# Altium PCB PCB.PcbDoc (part 1 of 2)
Units mm, origin at the board's own origin, x right, y up, seen from the top; angles counter-clockwise.
Board outline 144.27 x 96.27 mm, 4 copper layers (Top Layer, Layer 1, Layer 2, Bottom Layer), stack 0.603 mm thick; 103 components, 109 nets, 723 pads, 259 vias.
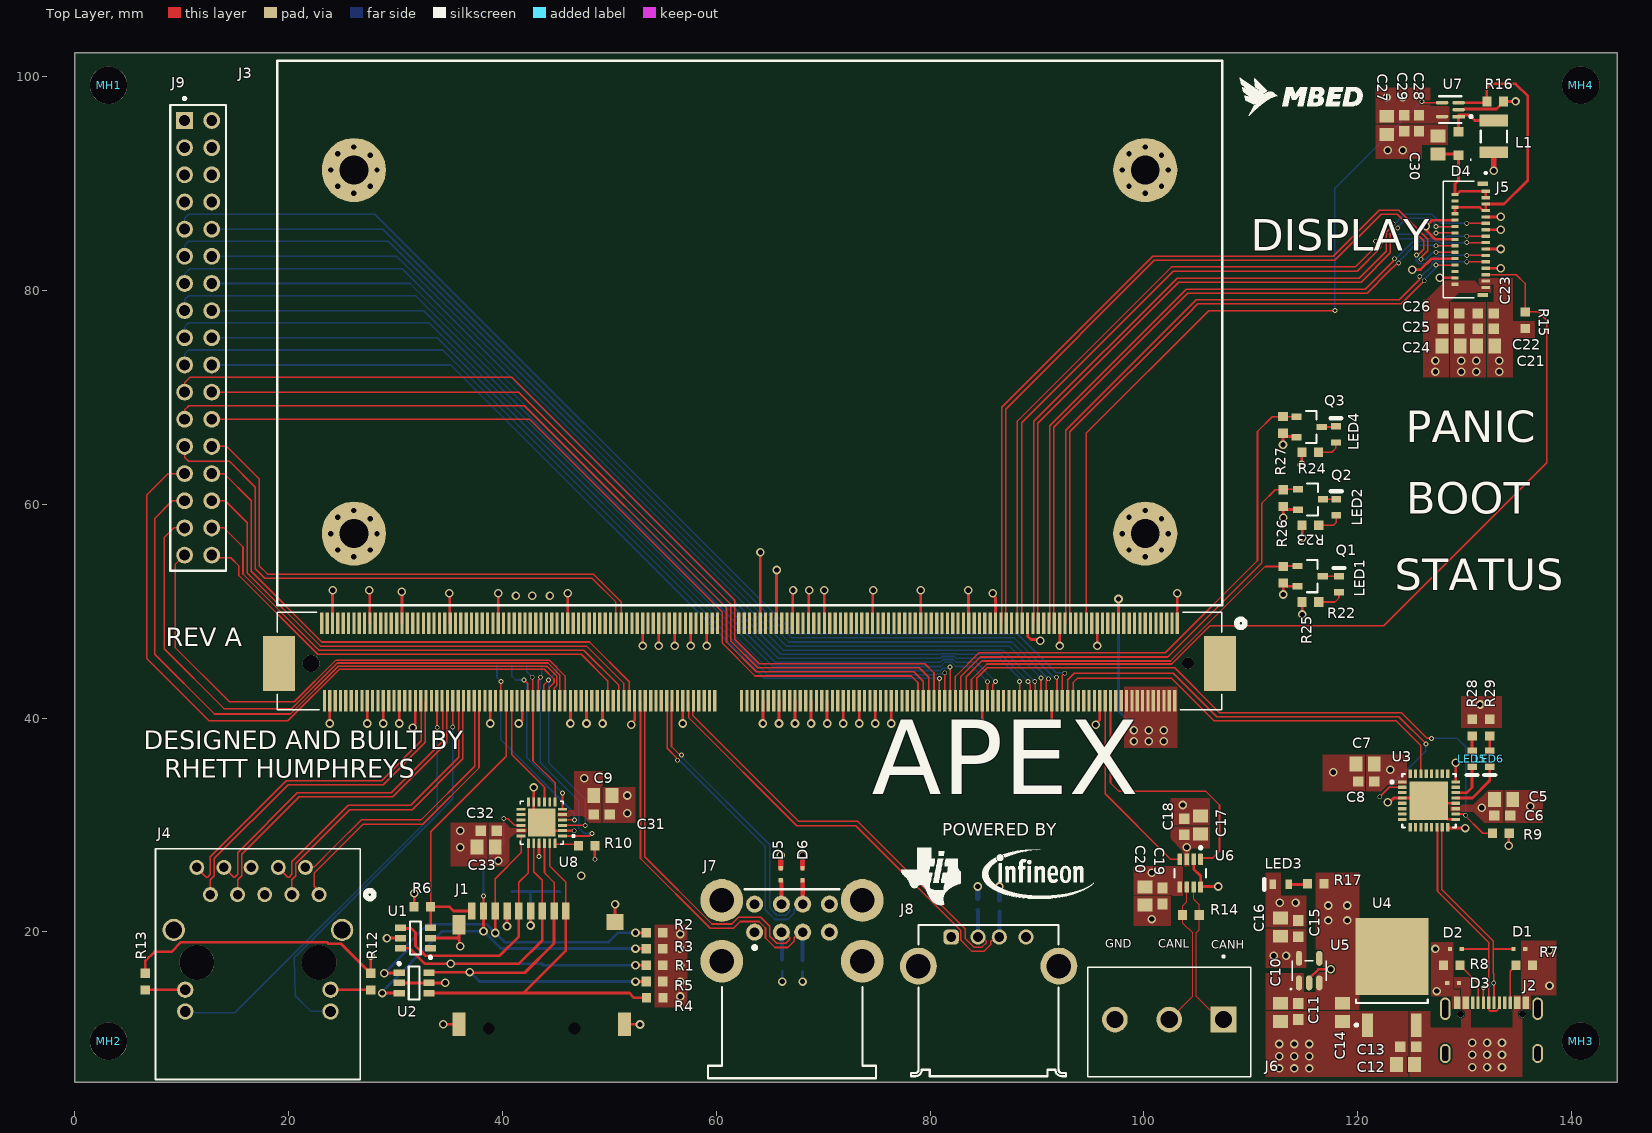
[diagram p0: Top Layer view]
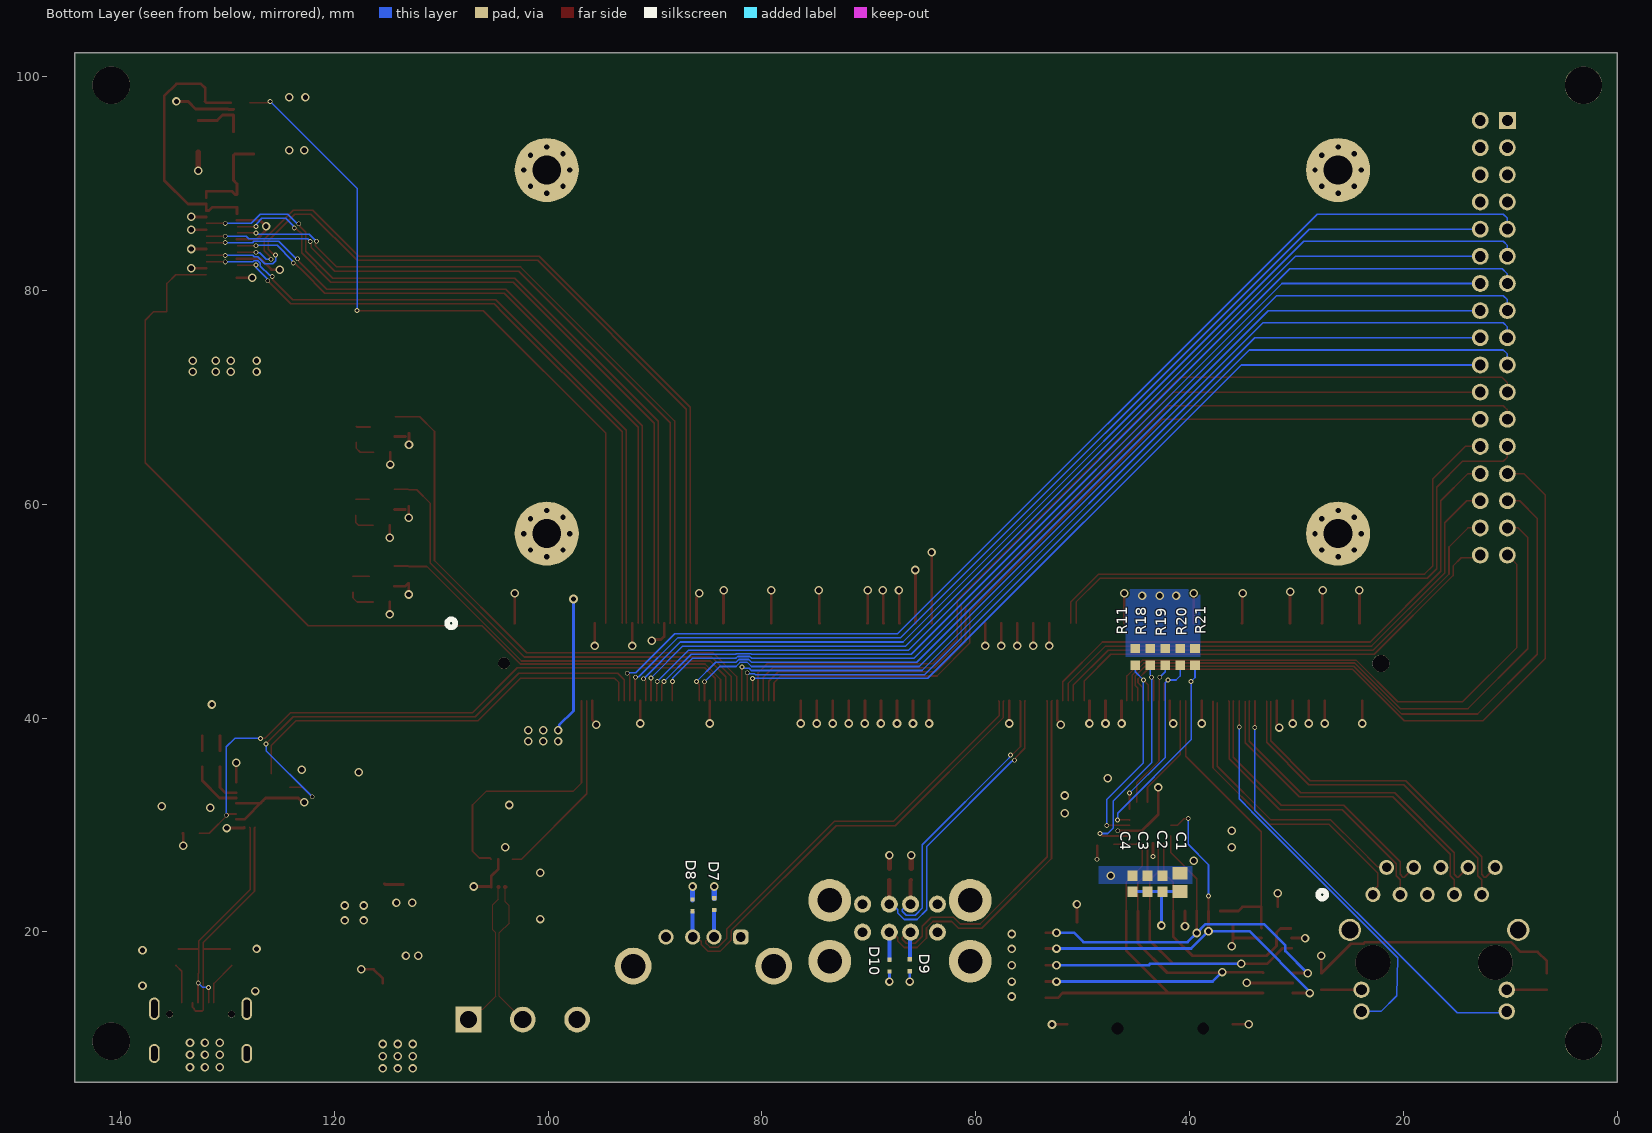
[diagram p1: Bottom Layer view, seen from below]
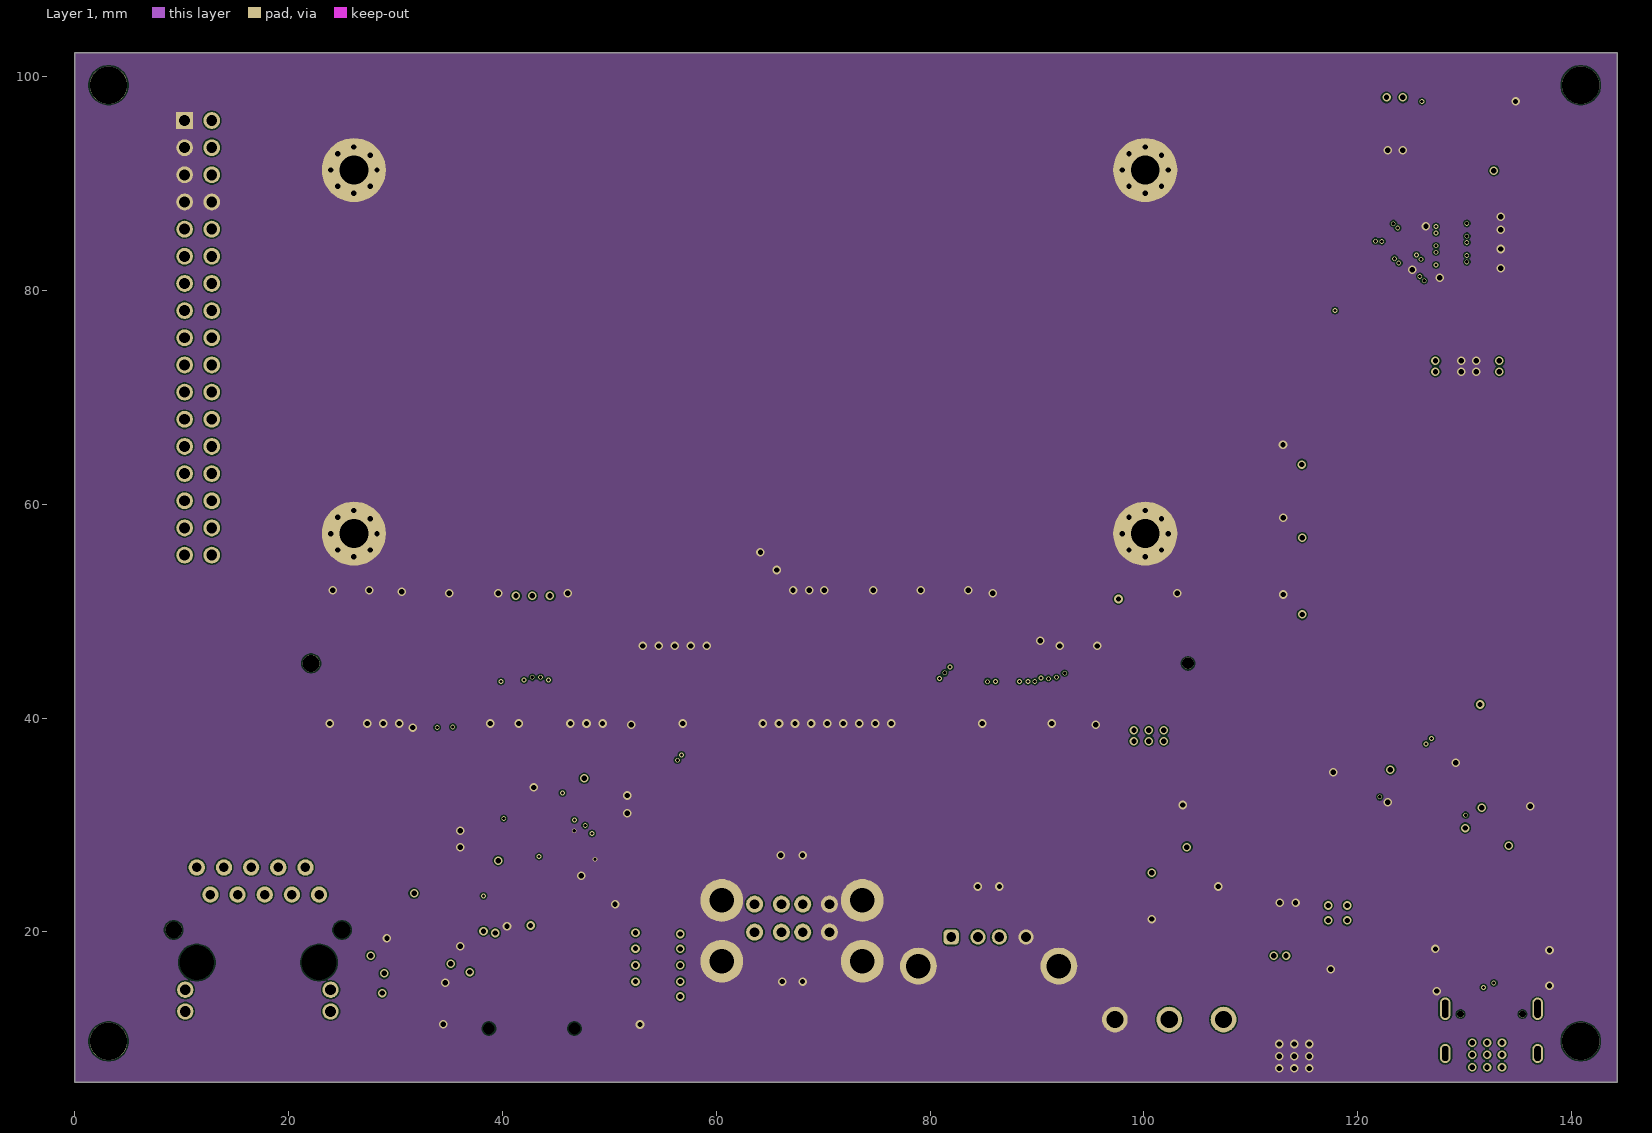
[diagram p2: Layer 1]
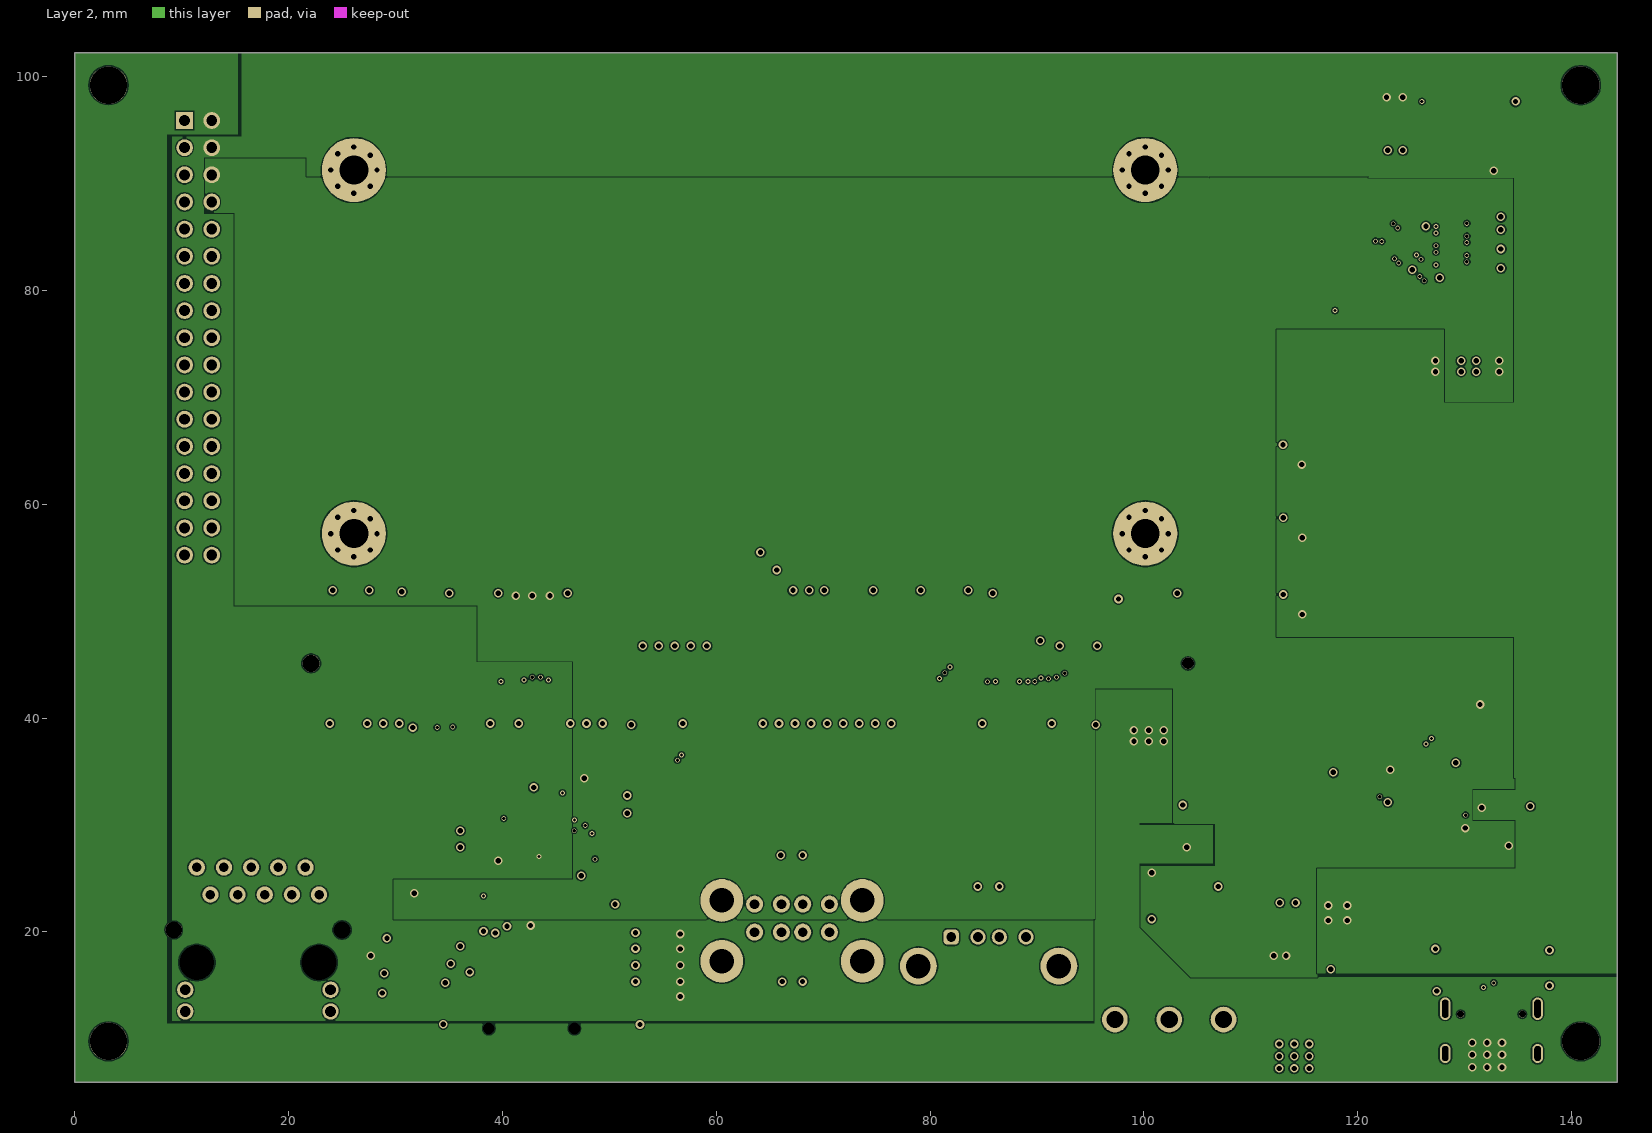
[diagram p3: Layer 2]
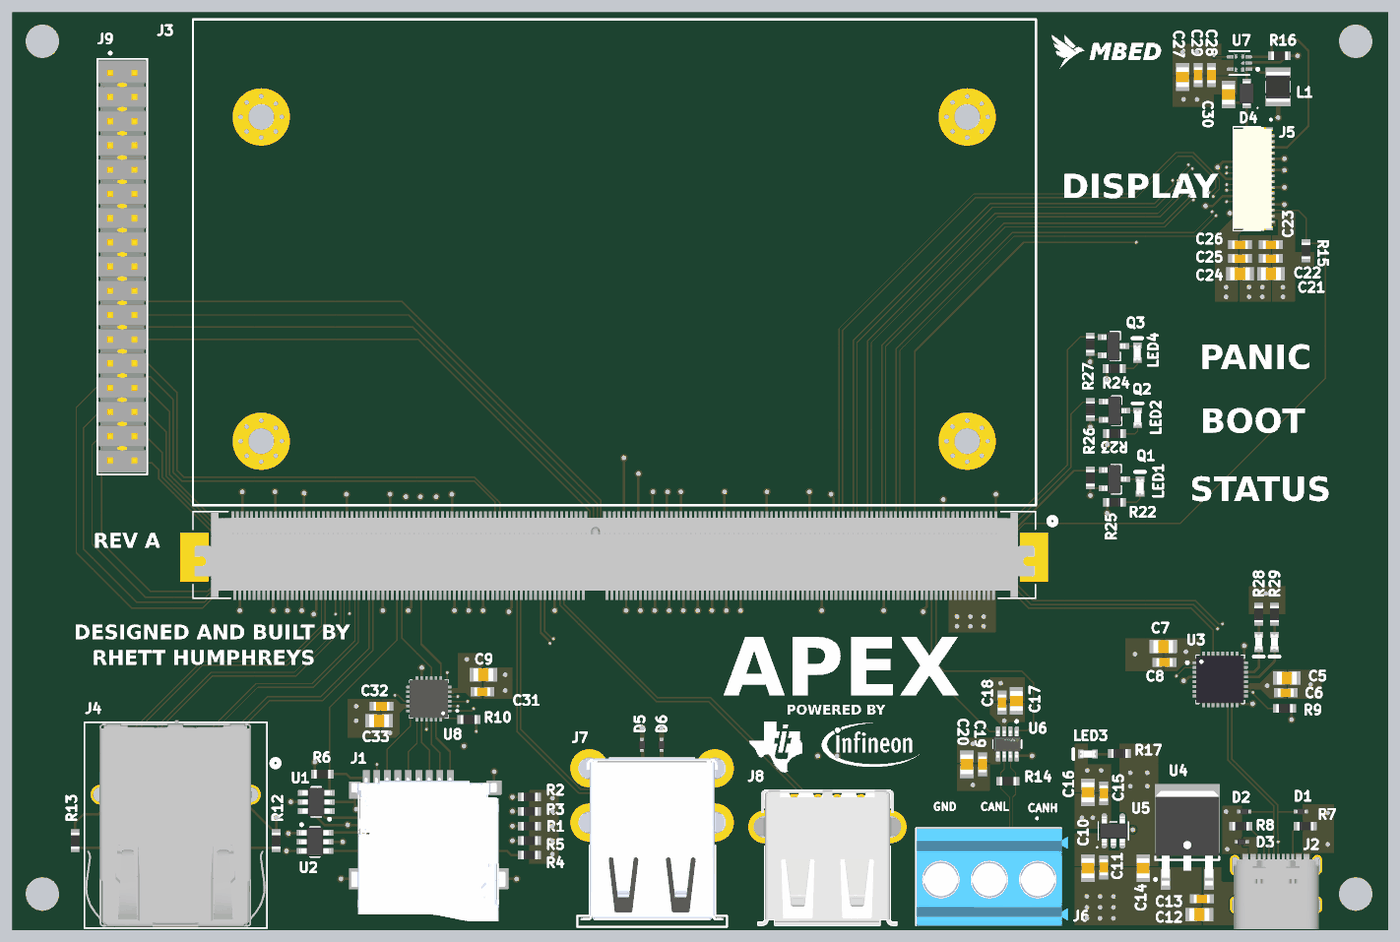
[diagram p5: 3D render of the assembled board from above, using the file's embedded part models]
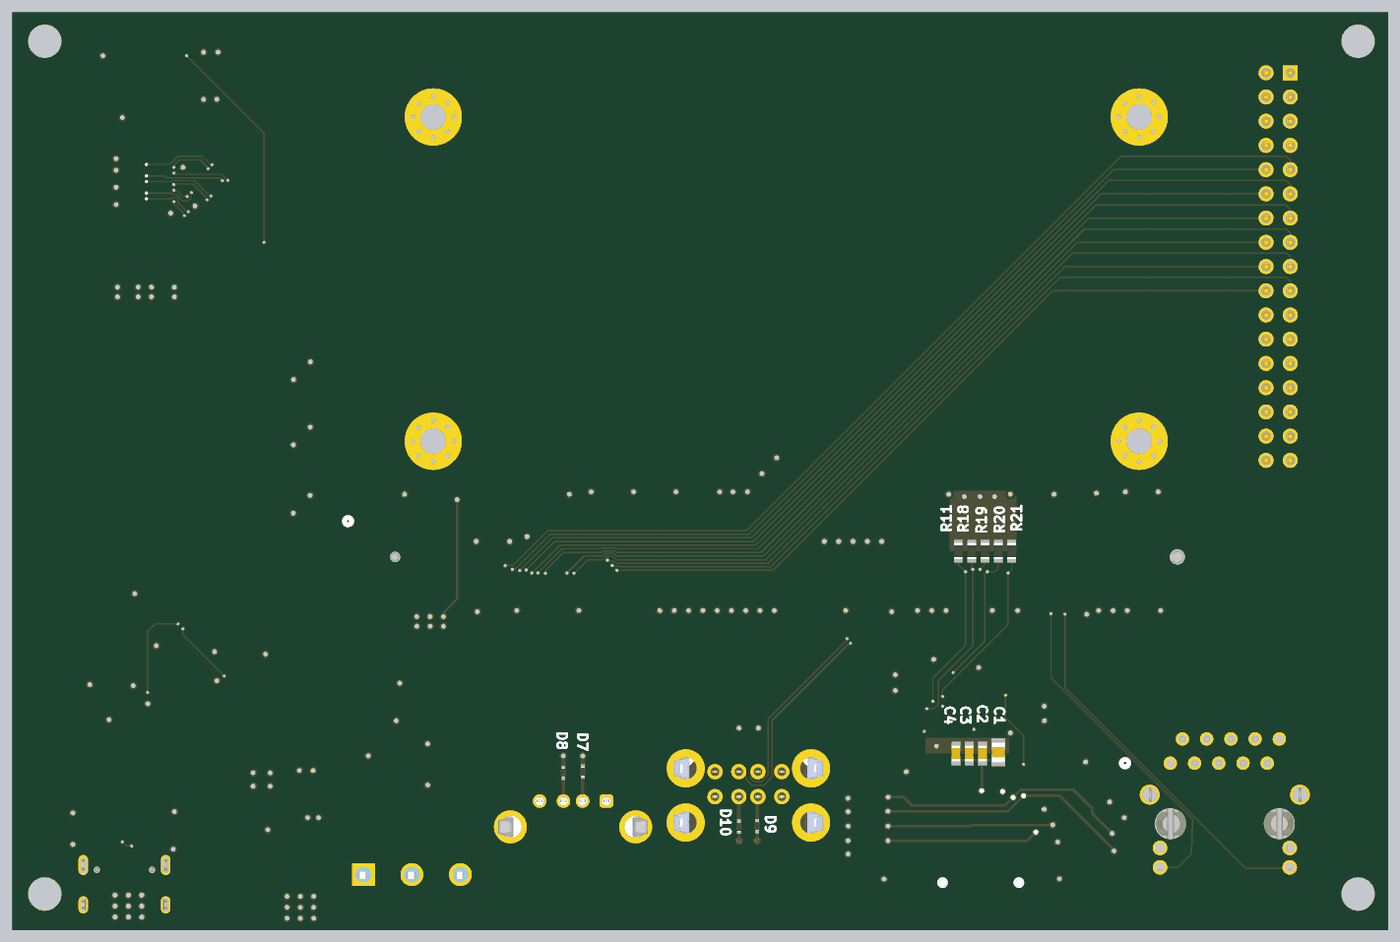
[diagram p6: 3D render of the assembled board from below, using the file's embedded part models]

## Layer stack, top to bottom
Top Solder: solder mask 0.0102, Solder Resist, Dk 3.5
Top Layer: signal copper 0.0356
Dielectric 2: prepreg 0.0711, PP-006, Dk 4.1
Layer 1: signal copper 0.035
Dielectric 1: dielectric 0.32, FR-4, Dk 4.8
Layer 2: signal copper 0.035
Dielectric 3: prepreg 0.0711, PP-006, Dk 4.1
Bottom Layer: signal copper 0.0356
Bottom Solder: solder mask 0.0102, Solder Resist, Dk 3.5

## Board outline
0,5.969 144.272,5.969 144.272,102.235 0,102.235

## Design rules (kind name [scope] priority, off if disabled: settings)
Clearance [All] p1: gap=0.125 ignorepadtopadclearanceinfootprint=FALSE
DiffPairsRouting USB_HS_PAIRS [InDifferentialPairClass('USB_HS_PAIRS')] p1: maxlimit=0.254 minlimit=0.254 mostfreqgap=0.254 toplayer_minwidth=0.15 toplayer_maxwidth=0.381 toplayer_prefwidth=0.16 midlayer1_minwidth=0.15 midlayer1_maxwidth=0.381 midlayer1_prefwidth=0.16 midlayer2_minwidth=0.15 midlayer2_maxwidth=0.381 midlayer2_prefwidth=0.16 bottomlayer_minwidth=0.15 bottomlayer_maxwidth=0.381 bottomlayer_prefwidth=0.16 maxuncoupledlength=12.7
DiffPairsRouting ETH_DIFF_PAIRS [InDifferentialPairClass('ETH_DIFF_PAIRS')] p2: maxlimit=0.254 minlimit=0.254 mostfreqgap=0.254 toplayer_minwidth=0.1 toplayer_maxwidth=0.381 toplayer_prefwidth=0.128 midlayer1_minwidth=0.1 midlayer1_maxwidth=0.381 midlayer1_prefwidth=0.128 midlayer2_minwidth=0.1 midlayer2_maxwidth=0.381 midlayer2_prefwidth=0.128 bottomlayer_minwidth=0.1 bottomlayer_maxwidth=0.381 bottomlayer_prefwidth=0.128 maxuncoupledlength=12.7
DiffPairsRouting [All] p3: maxlimit=0.254 minlimit=0.254 mostfreqgap=0.254 toplayer_minwidth=0.1 toplayer_maxwidth=0.381 toplayer_prefwidth=0.254 midlayer1_minwidth=0.1 midlayer1_maxwidth=0.381 midlayer1_prefwidth=0.254 midlayer2_minwidth=0.1 midlayer2_maxwidth=0.381 midlayer2_prefwidth=0.254 bottomlayer_minwidth=0.1 bottomlayer_maxwidth=0.381 bottomlayer_prefwidth=0.254 maxuncoupledlength=12.7
HoleSize [All] p1: absolutevalues=TRUE maxlimit=10 minlimit=0.025 maxpercent=80.000 minpercent=20.000
MinimumSolderMaskSliver [All] p1: minsoldermaskwidth=0.15
PolygonConnect [All] p1: connectstyle=Direct reliefconductorwidth=0.254 reliefentries=4 polygonreliefangle="90 Angle" airgapwidth=0.254
RoutingVias [All] p1: holewidth=0.711 width=1.27 viastyle="Through Hole" minholewidth=0.3 minwidth=0.45 maxholewidth=0.711 maxwidth=1.27
SilkToSilkClearance [All] p1: silktosilkclearance=0.15
SilkToSolderMaskClearance [IsPad] p1: minsilkscreentomaskgap=0.15 clearancetoexposedcopper=TRUE
SolderMaskExpansion [All] p1: expansion=0 istentingtop=FALSE
SupplyNets "Schematic Supply Nets_1" [InNet('5V')] p1: voltage=0.000
SupplyNets "Schematic Supply Nets_4" [InNet('3V3')] p2: voltage=0.000
SupplyNets "Schematic Supply Nets_3" [InNet('GND')] p3: voltage=0.000
SupplyNets "Schematic Supply Nets" [InNet('1V8')] p4: voltage=0.000
Width [All] p1: maxlimit=10 minlimit=0.15 preferedwidth=0.254 midlayer1_minwidth=0.254 midlayer1_maxwidth=0.254 midlayer2_minwidth=0.254 midlayer2_maxwidth=0.254 minimp=50.000000 maximp=50.000000 favimp=50.000000
25 further rules are at their usual default settings.

## Classes and differential pairs
net class ETH_DIFF_PAIRS: GBE0_TXRX_A_N GBE0_TXRX_A_P GBE0_TXRX_B_N GBE0_TXRX_B_P GBE0_TXRX_C_N GBE0_TXRX_C_P GBE0_TXRX_D_N GBE0_TXRX_D_P
component class LEDs: LED1 LED2 LED4 Q1 Q2 Q3 R22 R23 R24 R25 R26 R27
component class Headers: J9 MH1 MH2 MH3 MH4
component class USB: D5 D6 D7 D8 D9 D10 J7 J8
component class Display: 3 C21 C22 C23 C24 C25 C26 C27 C28 C29 C30 D4 J5 R15 R16 U7
component class CAN: C17 C18 C19 C20 J6 R14 U6
component class Ethernet: J4 R12 R13
component class "UART Debug": C5 C6 C7 C8 D1 D2 D3 J2 LED5 LED6 R7 R8 R9 R28 R29 U3
component class "SMARC Pinout-1": J3
component class Power: C10 C11 C12 C13 C14 C15 C16 LED3 R17 U4 U5
component class MicroSD: C1 C2 C3 C4 C9 C31 C32 C33 J1 R1 R2 R3 R4 R5 R6 R10 R11 R18 R19 R20 R21 U1 U2 U8
differential pair CAN0: +CAN0_P -CAN0_N
differential pair GBE0_TXRX_D: +GBE0_TXRX_D_P -GBE0_TXRX_D_N
differential pair GBE0_TXRX_C: +GBE0_TXRX_C_P -GBE0_TXRX_C_N
differential pair GBE0_TXRX_B: +GBE0_TXRX_B_P -GBE0_TXRX_B_N
differential pair GBE0_TXRX_A: +GBE0_TXRX_A_P -GBE0_TXRX_A_N
differential pair USB_DEBUG_D: +USB_DEBUG_D_P -USB_DEBUG_D_N
differential pair USB2_D: +USB2_D_P -USB2_D_N
differential pair USB1_D: +USB1_D_P -USB1_D_N
differential pair USB0_D: +USB0_D_P -USB0_D_N
differential pair DSIO0_D3: +DSIO0_D3_P -DSIO0_D3_N
differential pair DSIO0_D2: +DSIO0_D2_P -DSIO0_D2_N
differential pair DSIO0_D1: +DSIO0_D1_P -DSIO0_D1_N
differential pair DSIO0_D0: +DSIO0_D0_P -DSIO0_D0_N
differential pair DSIO0_CLK: +DSIO0_CLK_P -DSIO0_CLK_N

## Components (designator, comment, footprint, x,y, rotation, side; value= is the part's Value field where it differs from the comment)
C1 "1uF ± 10%" CAP-0805 40.894,24.638 r270 bottom
C2 "100nF ± 10%" CAP-0603 42.545,24.511 r270 bottom
C3 "100nF ± 10%" CAP-0603 43.942,24.511 r270 bottom
C4 "100nF ± 10%" CAP-0603 45.339,24.511 r270 bottom
C5 "1uF" CAP-0805 133.633,32.408 r180 top
C6 "100nF" CAP-0603 133.506,30.884 r180 top
C7 "1uF" CAP-0805 120.679,35.71 r0 top
C8 "100nF" CAP-0603 120.794,34.059 r0 top
C9 "1uF" CAP-0805 49.403,32.766 r180 top
C10 "1uF" CAP-0805 112.776,12.485 r90 top
C11 "100nF" CAP-0603 114.427,12.573 r90 top
C12 "1uF" CAP-0805 124.46,7.62 r0 top
C13 "100nF" CAP-0603 124.714,9.271 r0 top
C14 "1uF" CAP-0805 118.563,12.485 r90 top
C15 "100nF" CAP-0603 114.427,20.32 r270 top
C16 "1uF" CAP-0805 112.776,20.447 r270 top
C17 "1uF" CAP-0805 105.283,30.011 r270 top
C18 "100nF" CAP-0603 103.759,29.845 r270 top
C19 "100nF" CAP-0603 101.727,23.368 r90 top
C20 "1uF" CAP-0805 100.076,23.368 r90 top
C21 "1uF" CAP-0805 131.953,74.803 r0 top
C22 "100nF" CAP-0603 131.953,76.408 r0 top
C23 "100nF" CAP-0603 131.953,77.851 r0 top
C24 "1uF" CAP-0805 128.72,74.803 r180 top
C25 "100nF" CAP-0603 128.72,76.408 r180 top
C26 "100nF" CAP-0603 128.72,77.851 r180 top
C27 "1uF" CAP-0805 122.702,95.431 r90 top
C28 "100nF" CAP-0603 125.73,95.631 r90 top
C29 "100nF" CAP-0603 124.333,95.631 r90 top
C30 "1uF" CAP-0805 127.508,93.599 r270 top
C31 "100nF" CAP-0603 49.288,30.988 r180 top
C32 "100nF" CAP-0603 38.723,29.464 r0 top
C33 "1uF" CAP-0805 38.481,27.94 r0 top
D1 "DF2S10FS,L3M" DF2S10FS,L3M 135.109,18.415 r0 top
D2 "DF2S10FS,L3M" DF2S10FS,L3M 129.159,18.415 r180 top
D3 "DF2S10FS,L3M" DF2S10FS,L3M 128.905,15.24 r180 top
D4 "CUHS20S60,H3F" CUHS20S60,H3F 129.413,93.726 r270 top
D5 "DF2S10FS,L3M" DF2S10FS,L3M 66.04,25.4 r90 top
D6 "DF2S10FS,L3M" DF2S10FS,L3M 68.072,25.4 r90 top
D7 "DF2S10FS,L3M" DF2S10FS,L3M 84.455,22.606 r90 bottom
D8 "DF2S10FS,L3M" DF2S10FS,L3M 86.487,22.479 r90 bottom
D9 "DF2S10FS,L3M" DF2S10FS,L3M 66.167,16.891 r270 bottom
D10 "DF2S10FS,L3M" DF2S10FS,L3M 68.072,16.849 r270 bottom
J1 "MSD-4-A" MSD-4-A 43.688,15.748 r0 top
J2 "UJ20-C-H-G-SMT-1-P16-TR" UJ20-C-H-G-SMT-1-P16-TR 129.292,13.394 r0 top
J3 "SMARC Conn 314 Female" "SMARC 314 FEMALE" 62.992,64.516 r0 top locked
J4 "ARJM11C7-502-AB-ER2-T" ARJM11C7-502-AB-ER2-T_ABR 22.86,23.495 r0 top
J5 "FH35C-31S-0.3SHW(50)" HRS_FH35C-31S-0.3SHW(50) 130.553,84.768 r90 top
J6 "TB007-508-03BE" CUI_TB007-508-03BE 107.442,11.811 r180 top
J7 "USB1035-GF-P-0-B-B" USB1035-GF-P-0-B-B 67.09,17.272 r0 top
J8 "614004190021" 614004190021 85.471,13.589 r0 top
J9 "TSW-117-07-G-D" FP-TSW-117-07-G-D-MFG 11.557,75.565 r270 top
L1 "4u7H" IND-1210 132.715,94.405 r90 top
LED1 "0603 LED" "0603 LED" 118.237,52.51 r90 top
LED2 "0603 LED" "0603 LED" 117.983,59.702 r90 top
LED3 "0603 LED" "0603 LED" 112.776,24.447 r180 top
LED4 "0603 LED" "0603 LED" 117.951,66.523 r90 top
LED5 "0603 LED" "0603 LED" 130.683,36.195 r270 top
LED6 "0603 LED" "0603 LED" 132.334,36.195 r270 top
MH1 "Mouting Hole 3mm" MH3#1 3.839,98.796 r0 top
MH2 "Mouting Hole 3mm" MH3#2 3.175,9.525 r0 top
MH3 "Mouting Hole 3mm" MH3#3 140.843,9.779 r0 top
MH4 "Mouting Hole 3mm" MH3#3 140.843,99.187 r0 top
Q1 "SSF2300" SSF2300 115.538,53.272 r0 top
Q2 "SSF2300" SSF2300 115.57,60.452 r0 top
Q3 "SSF2300" SSF2300 115.443,67.219 r0 top
R1 "4k7 ± 1%" RES-0603 54.229,16.891 r0 top
R2 "4k7 ± 1%" RES-0603 54.229,19.939 r0 top
R3 "4k7 ± 1%" RES-0603 54.229,18.451 r0 top
R4 "4k7 ± 1%" RES-0603 54.242,13.843 r0 top
R5 "4k7 ± 1%" RES-0603 54.229,15.367 r0 top
R6 "10k ± 1%" RES-0603 32.525,22.352 r180 top
R7 "5k1" RES-0603 135.559,16.891 r180 top
R8 "5k1" RES-0603 128.791,16.891 r0 top
R9 "10k" RES-0603 133.379,29.233 r180 top
R10 "10k" RES-0603 47.879,28.067 r180 top
R11 "4k7" RES-0603 45.085,45.72 r90 bottom
R12 "100R" RES-0603 27.686,15.367 r90 top
R13 "100R" RES-0603 6.604,15.367 r90 top
R14 "120R" RES-0603 104.394,21.59 r0 top
R15 "10k" RES-0603 135.636,77.216 r270 top
R16 "2R" RES-0603 132.855,97.663 r180 top
R17 "100R" RES-0603 116.078,24.511 r180 top
R18 "4k7" RES-0603 43.688,45.72 r90 bottom
R19 "4k7" RES-0603 42.291,45.72 r90 bottom
R20 "4k7" RES-0603 40.894,45.72 r90 bottom
R21 "4k7" RES-0603 39.497,45.72 r90 bottom
R22 "100R" RES-0603 115.57,50.859 r180 top
R23 "100R" RES-0603 115.57,58.039 r180 top
R24 "100R" RES-0603 115.538,64.872 r180 top
R25 "10k" RES-0603 113.03,53.399 r90 top
R26 "10k" RES-0603 113.03,60.579 r90 top
R27 "10k" RES-0603 112.998,67.412 r90 top
R28 "100R" RES-0603 130.683,39.116 r90 top
R29 "100R" RES-0603 132.334,39.116 r90 top
U1 "ESDA6V1-4BC6" ESDA6V1-4BC6 31.877,19.431 r180 top
U2 "ESDA6V1-4BC6" ESDA6V1-4BC6 31.75,15.24 r0 top
U3 "CY7C65213-32LTXI" CY7C65213-32LTXI 126.648,32.281 r0 top
U4 "AZ1084CD-3.3TRG1" AZ1084CD-3.3TRG1 123.19,15.748 r90 top
U5 "TLV77718PDBVR" TLV77718PDBVR 115.443,16.39 r90 top
U6 "TCAN1044VDDFR" FP-DDF0008A-MFG 104.323,25.497 r270 top
U7 "TPS92360DCKR" FP-DCK0005A-IPC_C 128.651,96.901 r180 top
U8 "TXS02612RTWR" TXS02612RTWR 43.688,30.226 r180 top

## Footprints (in the part's own frame and the unit in brackets; to place one, negate y for a bottom-side part, rotate by r counter-clockwise, add the part's x,y. Pads: shape width x height; smd on the part's side, far side on the other; paste and mask are expansions set on the pad)
"0603 LED" [mm]
  rect 0.6x0.9 smd: 1(-0.75,0) 2(0.75,0)
  silkscreen extent 1.52,-0.51 1.52,0.51, body extent -0.84,-0.37 0.81,0.36, height 0.68
614004190021 [mm] "USB 2.0 Type A Horizontal THT"
  rrect50% 1.42x1.42 hole 0.92: 1(-3.5,5.935)
  round 1.42 hole 0.92: 2(-1,5.935) 3(1,5.935) 4(3.5,5.935)
  round 3.45 hole 2.3: Shell(-6.57,3.225) Shell(6.57,3.225)
  silkscreen extent -7.25,-7.08 7.25,7.07, body extent -7.85,-7.07 7.85,7.08, height 7.8
ARJM11C7-502-AB-ER2-T_ABR [mil]
  round 55 / inner round 60 / far side round 55 hole 35 paste-99999 mask+0: 1(0,0) 2(-50,100) 3(-100,0) 4(-150,100) 5(-200,0) 6(-250,100) 7(-300,0) 8(-350,100) 9(-400,0) 10(-450,100)
  round 60 hole 40 paste-99999 mask+0: 11(-492.5,-350) 12(-492.5,-430) 13(42.5,-350) 14(42.5,-430)
  round 128 / inner round 60 / far side round 128 hole 128 unplated paste-99999 mask+0: 15(-450,-250) 16(0,-250)
  round 82 / inner round 60 / far side round 82 hole 62 paste-99999 mask+0: 17(-535,-130) 18(85,-130)
  silkscreen extent -602,-681 202,168, body extent -598,-675 146,177, height 626
AZ1084CD-3.3TRG1 [mm] "D-PAK, 3-Pads, Body 6.20x6.71mm (max), IPC Medium Density"
  rect 2.2x1 smd: 1(-4.45,2.28) 3(-4.45,-2.28)
  rect 7.2x6.8 smd: 2(1.95,0)
  silkscreen extent -4.57,-3.35 -2.05,3.45, body extent -5.07,-3.35 4.83,3.35, height 2.52
CAP-0603 [mm] "Chip Capacitor, 2-Leads, Body 1.60x0.80mm, IPC Medium Density"
  rect 1x0.95 smd: 1(-0.75,0) 2(0.75,0)
  body extent -0.85,-0.45 0.85,0.45, height 0.9
CAP-0805 [mm] "Chip Capacitor, 2-Leads, Body 2.00x1.25mm, IPC Medium Density"
  rect 1.2x1.4 smd: 1(-0.85,0) 2(0.85,0)
  body extent -1.05,-0.67 1.05,0.67, height 0.95
CUHS20S60,H3F [mm] "SODFL, 2-Leads, Body 1.40x2.50mm, IPC Medium Density"
  rect 0.9x0.9 smd: 1(-1.1,0) 2(1.1,0)
  silkscreen extent 1.47,1.09 1.57,1.19, body extent -1.25,-0.75 1.25,0.75, height 0.6
CUI_TB007-508-03BE [mm]
  rect 2.4x2.4 / inner round 2.4 / far side rect 2.4x2.4 hole 1.6: 1(0,0)
  round 2.4 hole 1.6: 2(5.08,0) 3(10.16,0)
  silkscreen extent -2.54,-6 12.7,5.35, body extent -3.22,-4.83 12.62,5.42, height 14
CY7C65213-32LTXI [mm] "QFN,0.50mm pitch,square;32 pin,5.00mm L X 5.00mm W X 1.00mm H body (w/thermal tab)"
  rect 0.8x0.3 smd paste+0 mask+0: 1(-2.5,1.75) 2(-2.5,1.25) 3(-2.5,0.75) 4(-2.5,0.25) 5(-2.5,-0.25) 6(-2.5,-0.75) 7(-2.5,-1.25) 8(-2.5,-1.75) 17(2.5,-1.75) 18(2.5,-1.25) 19(2.5,-0.75) 20(2.5,-0.25) 21(2.5,0.25) 22(2.5,0.75) 23(2.5,1.25) 24(2.5,1.75)
  rect 0.3x0.8 smd paste+0 mask+0: 9(-1.75,-2.5) 10(-1.25,-2.5) 11(-0.75,-2.5) 12(-0.25,-2.5) 13(0.25,-2.5) 14(0.75,-2.5) 15(1.25,-2.5) 16(1.75,-2.5) 25(1.75,2.5) 26(1.25,2.5) 27(0.75,2.5) 28(0.25,2.5) 29(-0.25,2.5) 30(-0.75,2.5) 31(-1.25,2.5) 32(-1.75,2.5)
  rect 3.6x3.6 smd paste+0 mask+0: 33(0,0)
  silkscreen extent -3.57,-2.5 2.5,2.5, body extent -2.5,-2.5 2.5,2.5, height 1
DF2S10FS,L3M [mm] "SODFL, 2-Leads, Body 0.60x1.00mm, IPC Medium Density"
  rect 0.4x0.4 smd: 1(-0.55,0) 2(0.55,0)
  body extent -0.5,-0.32 0.5,0.33, height 0.45
ESDA6V1-4BC6 [mm] "SOT23, 6-Leads, Body 2.93x2.93mm, Pitch 0.95mm, IPC Medium Density"
  rect 1.05x0.6 smd: 1(-1.4,0.95) 2(-1.4,0) 3(-1.4,-0.95) 4(1.4,-0.95) 5(1.4,0) 6(1.4,0.95)
  silkscreen extent -1.53,-1.55 0.5,1.92, body extent -1.63,-1.52 1.63,1.53, height 1.45
FP-DCK0005A-IPC_C [mm]
  rect 1.164x0.336 smd paste+0 mask+0: 1(-0.77,0.65)
  rrect100% 1.164x0.336 smd paste+0 mask+0: 2(-0.77,0) 3(-0.77,-0.65) 4(0.77,-0.65) 5(0.77,0.65)
  silkscreen extent -2.05,-1.25 1.05,1.25, body extent -1.45,-1.1 1.45,1.1, height 0.25
FP-DDF0008A-MFG [mm]
  rrect22% 1.05x0.45 smd paste+0 mask+0: 1(-1.3,0.975) 2(-1.3,0.325) 3(-1.3,-0.325) 4(-1.3,-0.975) 5(1.3,-0.975) 6(1.3,-0.325) 7(1.3,0.325) 8(1.3,0.975)
  silkscreen extent -2.5,-1.48 0.4,1.48, body extent -1.92,-1.73 1.93,1.73, height 0.25
FP-TSW-117-07-G-D-MFG [mm]
  rect 1.57x1.57 hole 1.02 paste-2539.97 mask+0: 1(-20.32,-1.27)
  round 1.57 hole 1.02 paste-2539.97 mask+0: 2(-20.32,1.27) 3(-17.78,-1.27) 4(-17.78,1.27) 5(-15.24,-1.27) 6(-15.24,1.27) 7(-12.7,-1.27) 8(-12.7,1.27) 9(-10.16,-1.27) 10(-10.16,1.27) 11(-7.62,-1.27) 12(-7.62,1.27) 13(-5.08,-1.27) 14(-5.08,1.27) 15(-2.54,-1.27) 16(-2.54,1.27) 17(0,-1.27) 18(0,1.27) 19(2.54,-1.27) 20(2.54,1.27) 21(5.08,-1.27) 22(5.08,1.27) 23(7.62,-1.27) 24(7.62,1.27) 25(10.16,-1.27) 26(10.16,1.27) 27(12.7,-1.27) 28(12.7,1.27) 29(15.24,-1.27) 30(15.24,1.27) 31(17.78,-1.27) 32(17.78,1.27) 33(20.32,-1.27) 34(20.32,1.27)
  silkscreen extent -22.5,-2.61 21.78,2.61, body extent -21.88,-2.71 21.88,2.71, height 0.25
HRS_FH35C-31S-0.3SHW(50) [mm]
  rect 0.3x0.8 smd paste-1: 1(4.5,-1.4) 3(3.9,-1.4) 5(3.3,-1.4) 7(2.7,-1.4) 9(2.1,-1.4) 11(1.5,-1.4) 13(0.9,-1.4) 15(0.3,-1.4) 17(-0.3,-1.4) 19(-0.9,-1.4) 21(-1.5,-1.4) 23(-2.1,-1.4) 25(-2.7,-1.4) 27(-3.3,-1.4) 29(-3.9,-1.4) 31(-4.5,-1.4)
  rect 0.3x0.65 smd paste-1: 2(4.2,1.475) 4(3.6,1.475) 6(3,1.475) 8(2.4,1.475) 10(1.8,1.475) 12(1.2,1.475) 14(0.6,1.475) 16(0,1.475) 18(-0.6,1.475) 20(-1.2,1.475) 22(-1.8,1.475) 24(-2.4,1.475) 26(-3,1.475) 28(-3.6,1.475) 30(-4.2,1.475)
  rect 0.4x0.95 smd paste-1: S1(5.2,-1.125) S2(-5.2,-1.125)
  silkscreen extent -5.45,-1.5 6.3,2.55, body extent -5.46,-1.59 5.44,2.61, height 0.89
IND-1210 [mm] "Chip Inductor, 2-Leads, Body 3.20x2.50mm, IPC Medium Density"
  rect 1.1x2.64 smd: 1(-1.48,0) 2(1.48,0)
  silkscreen extent -0.55,-1.22 0.55,1.22, body extent -1.6,-1.25 1.6,1.25, height 1.2
MH3#1 [mm] "Mounting hole 3mm"
  round 3.5 hole 3.5 mask+0: 8(-0.664,0.391)
MH3#2 [mm] "Mounting hole 3mm"
  round 3.5 hole 3.5 mask+0: 8(0,0.254)
MH3#3 [mm] "Mounting hole 3mm"
  round 3.5 hole 3.5 mask+0: 8(0,0)
MSD-4-A [mm]
  rect 0.7x1.6 smd: 1(2.25,6.223) 2(1.15,6.223) 3(0.05,6.223) 4(-1.05,6.223) 5(-2.15,6.223) 6(-3.25,6.223) 7(-4.35,6.223) 8(-5.45,6.223) 9(-6.55,6.223)
  rect 1.2x2.2 smd: 10(-7.75,-4.377) 10(7.75,-4.377)
  rect 1.2x1.8 smd: 10(-7.75,4.923)
  rect 1.6x1.5 smd: 10(6.85,5.173)
  round 0 hole 1.1: ""(-4.95,-4.777) ""(3.05,-4.777)
  body extent -8.13,-8.83 8.02,6.22, height 1.8
RES-0603 [mm] "Chip Resistor, 2-Leads, Body 1.60x0.80mm, IPC Medium Density"
  rect 0.85x0.9 smd: 1(-0.775,0) 2(0.775,0)
  body extent -0.85,-0.45 0.85,0.45, height 0.5
"SMARC 314 FEMALE" [mil]
  round 236.22 hole 106.3: 315(-1451.69,1052.48) 315(-1451.69,-286.09) 315(1461.69,-286.09) 315(1461.69,1052.48)
  rect 118x203 smd paste-101.5 mask-101.5: MH1(1737.28,-763.65) MH2(-1727.28,-763.65)
  round 43 hole 43 unplated paste-99999 mask+0: MH3(1619.17,-763.65)
  round 63 hole 63 unplated paste-99999 mask+0: MH4(-1609.17,-763.65)
  rect 12x79 smd paste+0 mask+0: P1(-1559.96,-901.44) P2(-1540.28,-901.44) P3(-1520.59,-901.44) P4(-1500.91,-901.44) P5(-1481.22,-901.44) P6(-1461.54,-901.44) P7(-1441.85,-901.44) P8(-1422.17,-901.44) P9(-1402.48,-901.44) P10(-1382.8,-901.44) P11(-1363.11,-901.44) P12(-1343.43,-901.44) P13(-1323.74,-901.44) P14(-1304.06,-901.44) P15(-1284.37,-901.44) P16(-1264.69,-901.44) P17(-1245,-901.44) P18(-1225.32,-901.44) P19(-1205.63,-901.44) P20(-1185.94,-901.44) P21(-1166.26,-901.44) P22(-1146.57,-901.44) P23(-1126.89,-901.44) P24(-1107.2,-901.44) P25(-1087.52,-901.44) P26(-1067.83,-901.44) P27(-1048.15,-901.44) P28(-1028.46,-901.44) P29(-1008.78,-901.44) P30(-989.09,-901.44) P31(-969.41,-901.44) P32(-949.72,-901.44) P33(-930.04,-901.44) P34(-910.35,-901.44) P35(-890.67,-901.44) P36(-870.98,-901.44) P37(-851.3,-901.44) P38(-831.61,-901.44) P39(-811.93,-901.44) P40(-792.24,-901.44) P41(-772.56,-901.44) P42(-752.87,-901.44) P43(-733.19,-901.44) P44(-713.5,-901.44) P45(-693.82,-901.44) P46(-674.13,-901.44) P47(-654.45,-901.44) P48(-634.76,-901.44) P49(-615.08,-901.44) P50(-595.39,-901.44) P51(-575.71,-901.44) P52(-556.02,-901.44) P53(-536.34,-901.44) P54(-516.65,-901.44) P55(-496.97,-901.44) P56(-477.28,-901.44) P57(-457.6,-901.44) P58(-437.91,-901.44) P59(-418.23,-901.44) P60(-398.54,-901.44) P61(-378.86,-901.44) P62(-359.17,-901.44) P63(-339.49,-901.44) P64(-319.8,-901.44) P65(-300.12,-901.44) P66(-280.43,-901.44) P67(-260.75,-901.44) P68(-241.06,-901.44) P69(-221.38,-901.44) P70(-201.69,-901.44) P71(-182.01,-901.44) P72(-162.32,-901.44) P73(-142.64,-901.44) P74(-122.95,-901.44) P75(-24.53,-901.44) P76(-4.84,-901.44) P77(14.84,-901.44) P78(34.53,-901.44) P79(54.21,-901.44) P80(73.9,-901.44) P81(93.58,-901.44) P82(113.27,-901.44) P83(132.95,-901.44) P84(152.64,-901.44) P85(172.32,-901.44) P86(192.01,-901.44) P87(211.69,-901.44) P88(231.38,-901.44) P89(251.06,-901.44) P90(270.75,-901.44) P91(290.43,-901.44) P92(310.12,-901.44) P93(329.8,-901.44) P94(349.49,-901.44) P95(369.17,-901.44) P96(388.86,-901.44) P97(408.54,-901.44) P98(428.23,-901.44) P99(447.91,-901.44) P100(467.6,-901.44) P101(487.28,-901.44) P102(506.97,-901.44) P103(526.65,-901.44) P104(546.34,-901.44) P105(566.02,-901.44) P106(585.71,-901.44) P107(605.39,-901.44) P108(625.08,-901.44) P109(644.76,-901.44) P110(664.45,-901.44) P111(684.13,-901.44) P112(703.82,-901.44) P113(723.5,-901.44) P114(743.19,-901.44) P115(762.87,-901.44) P116(782.56,-901.44) P117(802.24,-901.44) P118(821.93,-901.44) P119(841.61,-901.44) P120(861.3,-901.44) P121(880.98,-901.44) P122(900.67,-901.44) P123(920.35,-901.44) P124(940.04,-901.44) P125(959.72,-901.44) P126(979.41,-901.44) P127(999.09,-901.44) P128(1018.78,-901.44) P129(1038.46,-901.44) P130(1058.15,-901.44) P131(1077.83,-901.44) P132(1097.52,-901.44) P133(1117.2,-901.44) P134(1136.89,-901.44) P135(1156.57,-901.44) P136(1176.26,-901.44) P137(1195.94,-901.44) P138(1215.63,-901.44) P139(1235.31,-901.44) P140(1255,-901.44) P141(1274.68,-901.44) P142(1294.37,-901.44) P143(1314.06,-901.44) P144(1333.74,-901.44) P145(1353.43,-901.44) P146(1373.11,-901.44) P147(1392.8,-901.44) P148(1412.48,-901.44) P149(1432.17,-901.44) P150(1451.85,-901.44) P151(1471.54,-901.44) P152(1491.22,-901.44) P153(1510.91,-901.44) P154(1530.59,-901.44) P155(1550.28,-901.44) P156(1569.96,-901.44) S1(-1569.8,-616.01) S2(-1550.12,-616.01) S3(-1530.43,-616.01) S4(-1510.75,-616.01) S5(-1491.06,-616.01) S6(-1471.38,-616.01) S7(-1451.69,-616.01) S8(-1432.01,-616.01) S9(-1412.32,-616.01) S10(-1392.64,-616.01) S11(-1372.95,-616.01) S12(-1353.27,-616.01) S13(-1333.58,-616.01) S14(-1313.9,-616.01) S15(-1294.21,-616.01) S16(-1274.53,-616.01) S17(-1254.84,-616.01) S18(-1235.16,-616.01) S19(-1215.47,-616.01) S20(-1195.79,-616.01) S21(-1176.1,-616.01) S22(-1156.42,-616.01) S23(-1136.73,-616.01) S24(-1117.05,-616.01) S25(-1097.36,-616.01) S26(-1077.68,-616.01) S27(-1057.99,-616.01) S28(-1038.31,-616.01) S29(-1018.62,-616.01) S30(-998.94,-616.01) S31(-979.25,-616.01) S32(-959.57,-616.01) S33(-939.88,-616.01) S34(-920.2,-616.01) S35(-900.51,-616.01) S36(-880.83,-616.01) S37(-861.14,-616.01) S38(-841.46,-616.01) S39(-821.77,-616.01) S40(-802.09,-616.01) S41(-782.4,-616.01) S42(-762.72,-616.01) S43(-743.03,-616.01) S44(-723.35,-616.01) S45(-703.66,-616.01) S46(-683.98,-616.01) S47(-664.29,-616.01) S48(-644.61,-616.01) S49(-624.92,-616.01) S50(-605.24,-616.01) S51(-585.55,-616.01) S52(-565.87,-616.01) S53(-546.18,-616.01) S54(-526.5,-616.01) S55(-506.81,-616.01) S56(-487.13,-616.01) S57(-467.44,-616.01) S58(-447.76,-616.01) S59(-428.07,-616.01) S60(-408.39,-616.01) S61(-388.7,-616.01) S62(-369.02,-616.01) S63(-349.33,-616.01) S64(-329.65,-616.01) S65(-309.96,-616.01) S66(-290.28,-616.01) S67(-270.59,-616.01) S68(-250.91,-616.01) S69(-231.22,-616.01) S70(-211.54,-616.01) S71(-191.85,-616.01) S72(-172.17,-616.01) S73(-152.48,-616.01) S74(-132.8,-616.01) S75(-113.11,-616.01) S76(-34.37,-616.01) S77(-14.69,-616.01) S78(5,-616.01) S79(24.68,-616.01) S80(44.37,-616.01) S81(64.06,-616.01) S82(83.74,-616.01) S83(103.43,-616.01) S84(123.11,-616.01) S85(142.8,-616.01) S86(162.48,-616.01) S87(182.17,-616.01) S88(201.85,-616.01) S89(221.54,-616.01) S90(241.22,-616.01) S91(260.91,-616.01) S92(280.59,-616.01) S93(300.28,-616.01) S94(319.96,-616.01) S95(339.65,-616.01) S96(359.33,-616.01) S97(379.02,-616.01) S98(398.7,-616.01) S99(418.39,-616.01) S100(438.07,-616.01) S101(457.76,-616.01) S102(477.44,-616.01) S103(497.13,-616.01) S104(516.81,-616.01) S105(536.5,-616.01) S106(556.18,-616.01) S107(575.87,-616.01) S108(595.55,-616.01) S109(615.24,-616.01) S110(634.92,-616.01) S111(654.61,-616.01) S112(674.29,-616.01) S113(693.98,-616.01) S114(713.66,-616.01) S115(733.35,-616.01) S116(753.03,-616.01) S117(772.72,-616.01) S118(792.4,-616.01) S119(812.09,-616.01) S120(831.77,-616.01) S121(851.46,-616.01) S122(871.14,-616.01) S123(890.83,-616.01) S124(910.51,-616.01) S125(930.2,-616.01) S126(949.88,-616.01) S127(969.57,-616.01) S128(989.25,-616.01) S129(1008.94,-616.01) S130(1028.62,-616.01) S131(1048.31,-616.01) S132(1067.99,-616.01) S133(1087.68,-616.01) S134(1107.36,-616.01) S135(1127.05,-616.01) S136(1146.73,-616.01) S137(1166.42,-616.01) S138(1186.1,-616.01) S139(1205.79,-616.01) S140(1225.47,-616.01) S141(1245.16,-616.01) S142(1264.84,-616.01) S143(1284.53,-616.01) S144(1304.21,-616.01) S145(1323.9,-616.01) S146(1343.58,-616.01) S147(1363.27,-616.01) S148(1382.95,-616.01) S149(1402.64,-616.01) S150(1422.32,-616.01) S151(1442.01,-616.01) S152(1461.69,-616.01) S153(1481.38,-616.01) S154(1501.06,-616.01) S155(1520.75,-616.01) S156(1540.43,-616.01) S157(1560.12,-616.01) S158(1579.8,-616.01)
  silkscreen extent -1734,-934 1828,1455, body extent -1727,-929 1740,-581, height 311
SSF2300 [mm] "SOT23, 3-Leads, Body 2.92x2.38mm, Pitch 0.95mm, IPC Medium Density"
  rect 0.95x0.6 smd: 1(-1.175,0.95) 2(-1.175,-0.95) 3(1.175,0)
  silkscreen extent -0.3,-1.5 0.7,1.5, body extent -1.25,-1.52 1.25,1.52, height 1.2
TLV77718PDBVR [mm] "SOT23, 5-Leads, Body 2.90x2.80mm, Pitch 0.95mm, IPC Medium Density"
  oval 1.4x0.6 smd: 1(-1.15,0.95) 2(-1.15,0) 3(-1.15,-0.95) 4(1.15,-0.95) 5(1.15,0.95)
  silkscreen extent -1.79,-1.59 0.94,1.76, body extent -1.5,-1.45 1.5,1.45, height 1.45
TXS02612RTWR [mm]
  rrect25% 0.86x0.27 smd: 1(-1.935,1.25) 2(-1.935,0.75) 3(-1.935,0.25) 4(-1.935,-0.25) 5(-1.935,-0.75) 6(-1.935,-1.25) 13(1.935,-1.25) 14(1.935,-0.75) 15(1.935,-0.25) 16(1.935,0.25) 17(1.935,0.75) 18(1.935,1.25)
  rrect25% 0.27x0.86 smd: 7(-1.25,-1.935) 8(-0.75,-1.935) 9(-0.25,-1.935) 10(0.25,-1.935) 11(0.75,-1.935) 12(1.25,-1.935) 19(1.25,1.935) 20(0.75,1.935) 21(0.25,1.935) 22(-0.25,1.935) 23(-0.75,1.935) 24(-1.25,1.935)
  rect 2.6x2.6 smd paste-0.48: 25(0,0)
  silkscreen extent -3.08,-2 2,2, body extent -2,-2 2,2, height 0.8
UJ20-C-H-G-SMT-1-P16-TR [mm] "USB C Conn Surface Mount (16 + 8 Dummy)"
  oval 1x1.8 hole 0.6 slot 1.4 at 90 deg: 1(-1.12,-4.755) 1(7.52,-4.755)
  oval 1x2.1 hole 0.6 slot 1.7 at 90 deg: 1(-1.12,-0.575) 1(7.52,-0.575)
  rect 0.6x1.15 smd: A1-B12(0,0) A4-B9(0.8,0) A9-B4(5.6,0) A12-B1(6.4,0)
  rect 0.3x1.15 smd: A5(1.95,0) A6(2.95,0) A7(3.45,0) A8(4.45,0) B5(4.95,0) B6(3.95,0) B7(2.45,0) B8(1.45,0)
  round 0.65 hole 0.65: ""(0.31,-1.075) ""(6.09,-1.075)
  body extent -1.26,-7.33 7.68,0.26, height 3.22
USB1035-GF-P-0-B-B [mm]
  round 1.6 hole 0.92: 1A(-3.5,5.33) 1B(-3.5,2.71) 2A(-1,5.33) 2B(-1,2.71) 3A(1,5.33) 3B(1,2.71) 4A(3.5,5.33) 4B(3.5,2.71)
  round 4 hole 2.3: 5(-6.57,0) 5(-6.57,5.68) 5(6.57,0) 5(6.57,5.68)
  silkscreen extent -7.85,-10.95 7.85,6.73, body extent -7.87,-10.28 7.86,6.72, height 16.09

## Part data
C1 C5 C7 C9 C10 C12 C14 C16 C17 C20 C21 C24 C27 C30 C33: library part CAP-0805, "Capacitor chip unpolarized. 0805"
C2 C3 C4 C6 C8 C11 C13 C15 C18 C19 C22 C23 C25 C26 C28 C29 C31 C32: library part CAP-0603, "Capacitor chip unpolarized. 0603"
D1 D2 D3 D5 D6 D7 D8 D9 D10: "TVS Diode 8VRM"
D4: "Diode Schottky 2A 0.5V"
J1: "Micro SD Connector"
J2: "USB-C Conn Surface Mount (16 + 8 Dummy)"
J4: "Ethernet connector with magnetics (1000-T Base)", Manufacturer_Name=Abracon, Copyright="Copyright (C) 2025 Ultra Librarian. All rights reserved.", Manufacturer_Part_Number=ARJM11C7-502-AB-ER2-T, RefDes=RefDes, Type=Type
J5: "31 Position FPC Connector Contacts, Top and Bottom 0.012 (0.30mm) Surface Mount, Right Angle", Package=None, Check_prices=https://www.snapeda.com/parts/FH35C-31S-0.3SHW(50)/Hirose/view-part/?ref=eda, MF="Hirose Electric", MP=FH35C-31S-0.3SHW(50), SnapEDA_Link=https://www.snapeda.com/parts/FH35C-31S-0.3SHW(50)/Hirose/view-part/?ref=snap
J6: "3 Pos, Screw Type, Horizontal, 5.08 Pitch, 24~12 (AWG), Terminal Block Connector", Package=None, Check_prices=https://www.snapeda.com/parts/TB007-508-03BE/Same+Sky/view-part/?ref=eda, MF="Same Sky", MP=TB007-508-03BE, SnapEDA_Link=https://www.snapeda.com/parts/TB007-508-03BE/Same+Sky/view-part/?ref=snap
J7: "USB-A (USB TYPE-A), Stacked USB 2.0 Receptacle Connector 8 Position Through Hole, Right Angle", Package=None, Check_prices=https://www.snapeda.com/parts/USB1035-GF-P-0-B-B/Global+Connector+Technology/view-part/?ref=eda, MF="Global Connector Technology", MP=USB1035-GF-P-0-B-B, SnapEDA_Link=https://www.snapeda.com/parts/USB1035-GF-P-0-B-B/Global+Connector+Technology/view-part/?ref=snap
J8: library part CMP-1502-03228-3, "USB Connector, 2.0 TYPE A, RECEPTACLE, THT; Connector Type: USB Type A; Standard: USB 2.0; Gender: Receptacle; No. of...", Contact Resistance=30mΩ, Current Rating=3A, Housing Color=White, Insulation Resistance=1GΩ, Max Operating Temperature=85°C, Min Operating Temperature=-40°C, Operating Supply Voltage=30V, Connector Type=USB, Contact Material=Brass, Contact Plating=Gold, Gender=Receptacle, Insulation Material=PBT, Mount="Horizontal, Through Hole", Number of Contacts=4, Number of Pins=4, Orientation=Horizontal, REACH SVHC=No, RoHS=Compliant, USB Standard="USB 2.0"
J9: library part CMP-02766-000015-1, "CONN HEADER VERT 34POS 2.54MM", Current Rating=6.3A, Manufacturer=Samtec, Temperature="-55°C to +125°C", Temperature Range High=+125°C, Temperature Range Low=-55°C, Voltage Rating=550V, Automotive=No, Category=Conn, ComponentLink2Description=Datasheet, ComponentLink2URL=http://suddendocs.samtec.com/prints/tsw-xxx-xx-xxx-x-xx-xxx-mkt.pdf, Conn Gender=Male, Conn Orientation=Vertical, Contact Material=Gold,Nickel, Device Class L1=Connectors, Device Class L2="Headers and Wire Housings", Device Class L3=unset, Digikey Description="CONN HEADER VERT 34POS 2.54MM", Footprint Url=http://suddendocs.samtec.com/prints/tsw-xxx-xx-x-x-xx-xxx-footprint.pdf, Height=8.71mm, Lead Free=No, Manufacturer Part Number=TSW-117-07-G-D, Number of Contacts=34, Number Of Rows=2, Octopart=https://octopart.com/tsw-117-07-g-d-samtec-272162, Package=TSW-117-07-G-D, Pitch=2.54mm, RoHS=TRUE
L1: library part IND-1210
MH1 MH2 MH3 MH4: library part MH3
Q1 Q2 Q3: "NMOS 20V 4.5A SOT23"
R1 R2 R3 R4 R5 R6 R7 R8 R9 R10 R11 R12 R13 R14 R15 R16 R17 R18 R19 R20 R21 R22 R23 R24 R25 R26 R27 R28 R29: library part RES-0603, "Resistor chip. 0603"
U1 U2: "TVS Diode array 5VRM 7.4VC"
U3: "USB-UART LP Bridge Controller", Manufacturer="Infineon Technologies", Manufacturer Order Number=CY7C65213-32LTXI, PackageReference=QFN-32
U4: "3V3 LDO 1A 1.5V Dropout"
U5: "LDO 1.8V 1A"
U6: library part CMP-04872-000216-1, "IC TRANSCEIVER FULL 1/1 SOT23-8"
U7: library part CMP-04914-000056-1, "38-V 1.2-A single channel LED backlight driver 5-SC70 -40 to 85"
U8: "Voltage Level Translator 24-Pin WQFN EP T/R", Package=None, Check_prices=https://www.snapeda.com/parts/TXS02612RTWR%20./Texas+Instruments/view-part/?ref=eda, MF="Texas Instruments", MP="TXS02612RTWR .", SnapEDA_Link=https://www.snapeda.com/parts/TXS02612RTWR%20./Texas+Instruments/view-part/?ref=snap

## Via types
v1: diameter 0.8, hole 0.5, Top Layer to Bottom Layer, tented both sides, 169 vias
v2: diameter 0.45, hole 0.3, Top Layer to Bottom Layer, tented both sides, 58 vias
v3: diameter 0.8, hole 0.5, Top Layer to Bottom Layer, 32 vias

## Nets (pads, with @x,y where several pads share a name; then routed paths per layer and width w, separated by ;. In a path a pad name is that pad's centre, name@x,y a point inside that pad or via, vN(x,y) a via of type N, cw(c..) or ccw(c..) an arc to the next point about the centre after c; other vN are vias at no path point)
1V8: C7.2 C8.2 C9.2 C15.2 C16.2 C19.2 C20.2 C21.2 C22.2 C23.2 C31.2 J5.29 J9.6 R6.2 R9.1 R11.2 R15.2 R18.2 R19.2 R20.2 R21.2 R28.2 R29.2 U3.1 U3.16 U5.5 U6.5 U8.5 | length 4.2
  Top Layer w0.254: R6.2@31.75,22.352 v1(31.75,23.622) ; U3.16@128.398,29.781 128.398,29.741 128.421,29.718 v1(130.048,29.718) ; v1(134.112,28.067) 134.112,29.191 R9.1@134.154,29.233
  other v1: 112.141,17.78 113.284,17.78 100.711,25.527 47.656,34.37 123.042,35.179 131.424,41.275 41.275,51.435 42.799,51.435 44.45,51.435 133.223,72.39 133.223,73.406
3V3: C1.2 C2.2 C3.2 C4.2 C5.2 C6.2 C10.2 C11.2 C14.2 C24.2 C25.2 C26.2 C27.2 C28.2 C29.2 C32.2 C33.2 J1.4 J5.30 J5.31 J9.4 L1.1 R1.2 R2.2 R3.2 R4.2 R5.2 R12.2 R13.2 R17.1 R22.2 R23.2 R24.2 U3.19 U4.2 U5.1 U5.3 U7.5 U8.17 U8.21 | length 41.3
  Top Layer w0.254: R13.2@6.604,16.142 6.604,17.272 7.479,18.147 9.054,18.147 9.957,19.05 23.61,19.05 23.761,18.9 24.903,18.9 27.661,16.142 R12.2@27.686,16.142 v1(27.686,17.78) ; v1(42.638,20.608) J1.4@42.638,21.971 ; v2@43.438,27.055 U8.21@43.438,28.291 ; v1(114.763,63.709) R24.2@114.763,64.872 ; v1(114.795,49.696) R22.2@114.795,50.859 ; v1(114.795,56.876) R23.2@114.795,58.039
  Top Layer w0.5: v1(132.715,91.186) L1.1@132.715,92.925
  Bottom Layer w0.254: C1.2@40.894,23.788 45.312,23.788 C4.2@45.339,23.761 ; C2.2@42.545,23.761 42.638,23.668 v1(42.638,20.608)
  other v1: 56.642,13.97 56.642,15.367 56.642,16.891 56.642,18.415 56.642,19.812 117.221,21.082 118.999,21.082 117.221,22.479 118.999,22.479 39.624,26.67 131.572,31.623 127.254,72.39 127.254,73.406 122.682,98.044 124.206,98.044
  other v2: 43.44,27.053
5V: C12.2 C13.2 C17.2 C18.2 D3.1 J2.A4-B9 J2.A9-B4 J3.P147 J3.P148 J3.P149 J3.P150 J3.P151 J3.P152 J3.P153 J3.P154 J3.P155 J3.P156 J3.S147 J9.2 U4.3 U6.3 | length 15.1
  Top Layer w0.254: J3.S147@97.619,48.869 v1(97.619,51.137)
  Bottom Layer w0.254: v1(97.619,51.137) 97.619,40.684 98.956,39.347 98.956,38.966 v1(99.06,38.862)
  other v1: 130.683,7.366 132.08,7.366 133.477,7.366 130.683,8.509 132.08,8.509 133.477,8.509 130.683,9.652 132.08,9.652 133.477,9.652 104.013,27.94 99.06,37.846 100.457,37.846 101.854,37.846 100.457,38.862 101.854,38.862
CAN0_N: J6.2 R14.1 U6.6 | length 13.8
  Top Layer w0.1: J6.2@102.362,11.811 104.548,13.997 104.548,19.912 103.619,20.841 R14.1@103.619,21.59 103.619,22.466 103.998,22.845 U6.6@103.998,24.197
  Top Layer w0.381: U6.6@103.998,24.197 U6.6@104.005,24.189
CAN0_P: J6.1 R14.2 U6.7 | length 14
  Top Layer w0.1: U6.7@104.648,24.197 104.648,23.067 105.169,22.546 R14.2@105.169,21.59 105.169,20.206 104.902,19.939 104.902,13.97 106.151,12.721 106.532,12.721 J6.1@107.442,11.811
  Top Layer w0.381: U6.7@104.64,24.189 U6.7@104.648,24.197
CAN0_RX: J3.P144 U6.1 | length 25.1
  Top Layer w0.15: J3.P144@96.869,41.619 96.869,33.941 97.663,33.147 105.791,33.147 107.061,31.877 107.061,27.559 106.426,26.924 105.425,26.924 U6.1@105.298,26.797
CAN0_TX: J3.P143 U6.4 | length 18.2
  Top Layer w0.15: J3.P143@96.369,41.619 96.369,32.917 102.489,26.797 U6.4@103.348,26.797
CARRIER_PWN_ON: J3.S154
DBGU_RX: J3.P137 U3.30 | length 39.6
  Top Layer w0.15: J3.P137@93.369,41.619 93.369,43.331 93.75,43.712 102.592,43.712 106.553,39.751 123.571,39.751 125.898,37.424 U3.30@125.898,34.781
DBGU_TX: J3.P136 U3.2 | length 47.7
  Top Layer w0.15: J3.P136@92.869,41.619 92.869,43.593 93.472,44.196 102.743,44.196 106.807,40.132 123.825,40.132 v2(126.365,37.592) ; v2(122.047,32.639) 122.939,33.531 U3.2@124.148,33.531
  Bottom Layer w0.15: v2(122.047,32.639) 126.365,36.957 v2(126.365,37.592)
DSIO0_CLK_N: J3.S135 J5.18 | length 63
  Top Layer w0.128: J3.S135@91.619,48.869 91.56,48.928 91.56,67.176 103.109,78.725 104.11,79.726 120.864,79.726 122.902,81.764 123.59,82.451 123.639,82.451 123.738,82.55 v2(123.825,82.55) ; v2@127.309,84.168 J5.18@129.078,84.168
  Bottom Layer w0.128: v2(123.825,82.55) 123.825,82.637 123.924,82.736 123.924,82.785 125.34,84.202 127.275,84.202 v2(127.311,84.166)
DSIO0_CLK_P: J3.S134 J5.17 | length 66.5
  Top Layer w0.128: J3.S134@91.119,48.869 91.178,48.928 91.178,67.334 102.727,78.883 103.952,80.108 120.706,80.108 122.744,82.146 123.32,82.721 123.32,82.771 123.418,82.869 v2(123.418,82.957) ; v2@130.184,84.468 J5.17@131.953,84.468
  Bottom Layer w0.128: v2(123.418,82.957) 123.506,82.957 123.604,83.055 123.654,83.055 125.182,84.584 127.505,84.584 127.623,84.466 v2(130.186,84.466)
DSIO0_D0_N: J3.S126 J5.21 | length 76.9
  Top Layer w0.128: J3.S126@87.119,48.869 87.06,48.928 87.06,68.899 100.964,82.803 117.855,82.803 122.174,87.122 123.666,87.122 126.17,84.618 126.17,83.857 125.686,83.374 125.538,83.374 v2(125.476,83.312) ; v2@130.184,83.268 J5.21@131.953,83.268
  Bottom Layer w0.128: v2(125.476,83.312) 125.476,82.76 125.74,82.496 126.497,82.496 127.124,83.122 127.453,83.122 127.596,83.266 v2(130.186,83.266)
DSIO0_D0_P: J3.S125 J5.20 | length 74.4
  Top Layer w0.128: J3.S125@86.619,48.869 86.678,48.928 86.678,69.057 100.806,83.185 117.697,83.185 122.016,87.504 123.824,87.504 126.552,84.777 126.552,83.698 125.973,83.12 125.973,82.971 v2(125.912,82.91) ; v2@127.309,83.568 J5.20@129.078,83.568
  Bottom Layer w0.128: v2(125.912,82.91) 126.371,82.91 126.966,83.504 127.249,83.504 v2(127.311,83.566)
DSIO0_D1_N: J3.S129 J5.15 | length 69.7
  Top Layer w0.128: v2(130.186,85.066) J5.15@131.953,85.068
  Top Layer w0.15: J3.S129@88.619,48.869 88.571,48.917 88.571,67.616 102.743,81.788 119.932,81.788 122.148,84.005 122.148,84.344 122.184,84.38 122.184,84.525 v2(122.241,84.582)
  Bottom Layer w0.128: v2@122.241,84.61 122.479,84.848 127.996,84.848 128.214,85.066 v2(130.186,85.066)
DSIO0_D1_P: J3.S128 J5.14 | length 67.5
  Top Layer w0.128: v2(127.311,85.366) J5.14@129.078,85.368
  Top Layer w0.15: J3.S128@88.119,48.869 88.167,48.917 88.167,67.783 102.576,82.192 119.764,82.192 121.744,84.172 121.744,84.359 121.709,84.395 121.709,84.539 v2(121.651,84.597)
  Bottom Layer w0.128: v2(121.651,84.597) 122.306,85.252 127.115,85.252
  Bottom Layer w0.15: 127.115,85.252 127.23,85.366 v2(127.311,85.366)
DSIO0_D2_N: J3.S132 J5.12 | length 67.3
  Top Layer w0.128: J3.S132@90.119,48.869 90.06,48.928 90.06,67.581 103.251,80.772 120.301,80.772 123.037,83.508 123.037,85.276 123.488,85.728 123.538,85.728 123.636,85.826 v2(123.724,85.826) ; v2@127.309,85.968 J5.12@129.078,85.968
  Bottom Layer w0.128: v2(123.724,85.826) 123.724,85.914 123.822,86.012 123.822,86.062 124.502,86.741 126.746,86.741 127.249,86.238 127.249,86.028 v2(127.311,85.966)
DSIO0_D2_P: J3.S131 J5.11 | length 70.7
  Top Layer w0.128: J3.S131@89.619,48.869 89.678,48.928 89.678,67.739 103.093,81.154 120.143,81.154 122.655,83.666 122.655,85.435 123.218,85.998 123.218,86.047 123.317,86.146 v2(123.317,86.233) ; v2@130.184,86.268 J5.11@131.953,86.268
  Bottom Layer w0.128: v2(123.317,86.233) 123.404,86.233 123.503,86.332 123.552,86.332 124.343,87.123 126.904,87.123 127.761,86.266 v2(130.186,86.266)
DSIO0_D3_N: J3.S138 J5.24 | length 60.6
  Top Layer w0.128: J3.S138@93.119,48.869 93.06,48.928 93.06,66.771 104.125,77.836 105.029,78.74 124.04,78.74 v2(126.201,80.901) ; v2(127.311,82.366) J5.24@129.078,82.368
  Bottom Layer w0.128: v2(126.201,80.901) 126.201,80.988 126.299,81.087 126.299,81.136 127.279,82.116 127.279,82.334 v2(127.311,82.366)
DSIO0_D3_P: J3.S137 J5.23 | length 64.3
  Top Layer w0.128: J3.S137@92.619,48.869 92.678,48.928 92.678,66.929 103.743,77.994 104.871,79.122 123.882,79.122 125.764,81.004 125.764,81.277 v2(125.794,81.308) ; v2(130.186,82.666) J5.23@131.953,82.668
  Bottom Layer w0.128: v2(125.794,81.308) 125.881,81.308 125.98,81.406 126.029,81.406 126.897,82.274 126.897,82.537 127.14,82.78 127.482,82.78 127.596,82.666 v2(130.186,82.666)
DSIO0_DSI_TE: J3.S144
GBE0_LINK1000#: J3.P22 J4.12 | length 41.9
  Top Layer w0.15: J3.P22@33.869,41.619 33.889,41.599 33.889,39.136 v2(33.909,39.116)
  Bottom Layer w0.15: J4.12@10.092,12.446 14.986,12.446 33.909,31.369 v2(33.909,39.116)
GBE0_LINK_ACT#: J3.P25 J4.14 | length 37.6
  Top Layer w0.15: v2(35.369,39.179) J3.P25@35.369,41.619
  Bottom Layer w0.15: J4.14@23.939,12.573 22.098,12.573 20.675,13.996 20.633,14.038 20.631,14.098 20.534,17.539 20.534,17.605 20.578,17.649 34.184,31.255 34.184,31.263 35.369,32.448 v2(35.369,39.179)
GBE0_TXRX_A_N: J3.P29 J4.2 | length 25.7
  Top Layer w0.15: J4.2@21.59,26.035 21.664,26.109 22.426,26.109 24.316,27.999 26.797,30.48 32.385,30.48 37.417,35.512 J3.P29@37.417,41.453
GBE0_TXRX_A_P: J3.P30 J4.1 | length 27.9
  Top Layer w0.15: J4.1@22.86,23.495 22.86,23.832 22.406,24.286 22.406,25.518 24.72,27.831 26.964,30.076 32.552,30.076 37.821,35.345 J3.P30@37.821,41.571
GBE0_TXRX_B_N: J3.P26 J4.4 | length 27.9
  Top Layer w0.128: J4.4@19.05,26.035 19.946,25.139 20.052,25.139 20.32,25.408 20.32,26.561 25.589,31.83 31.416,31.83 35.928,36.341 35.928,41.56 J3.P26@35.869,41.619
GBE0_TXRX_B_P: J3.P27 J4.3 | length 28.2
  Top Layer w0.128: J4.3@20.32,23.495 20.32,24.867 20.702,25.249 20.702,26.403 25.747,31.448 31.575,31.448 36.31,36.183 36.31,41.56 J3.P27@36.369,41.619
GBE0_TXRX_C_N: J3.P23 J4.8 | length 31.1
  Top Layer w0.128: J4.8@13.97,26.035 14.866,25.139 14.972,25.139 15.24,25.408 15.24,27.432 20.829,33.021 29.592,33.021 34.428,37.857 34.428,41.56 J3.P23@34.369,41.619
GBE0_TXRX_C_P: J3.P24 J4.7 | length 31.3
  Top Layer w0.128: J4.7@15.24,23.495 15.24,24.867 15.622,25.249 15.622,27.274 20.987,32.639 29.75,32.639 34.81,37.699 J3.P24@34.81,41.56
GBE0_TXRX_D_N: J3.P19 J4.10 | length 31.3
  Top Layer w0.128: J4.10@11.43,26.035 12.326,25.139 12.432,25.139 12.7,25.408 12.7,27.051 19.813,34.164 28.703,34.164 32.428,37.889 J3.P19@32.428,41.56
GBE0_TXRX_D_P: J3.P20 J4.9 | length 31.6
  Top Layer w0.128: J4.9@12.7,23.495 12.7,24.867 13.082,25.249 13.082,26.893 19.971,33.782 28.861,33.782 32.81,37.731 32.81,41.56 J3.P20@32.821,41.571